# Altium PCB EMI-11-AF-5_IdtMcuV1_1.PcbDoc (part 2 of 2)
Units mm, origin at the board's own origin, x right, y up, seen from the top; angles counter-clockwise.
Board outline 22 x 20.01 mm, 4 copper layers (Top, Signal 1, Signal 2, Bottom), stack 1.02 mm thick; 58 components, 42 nets, 172 pads, 100 vias.
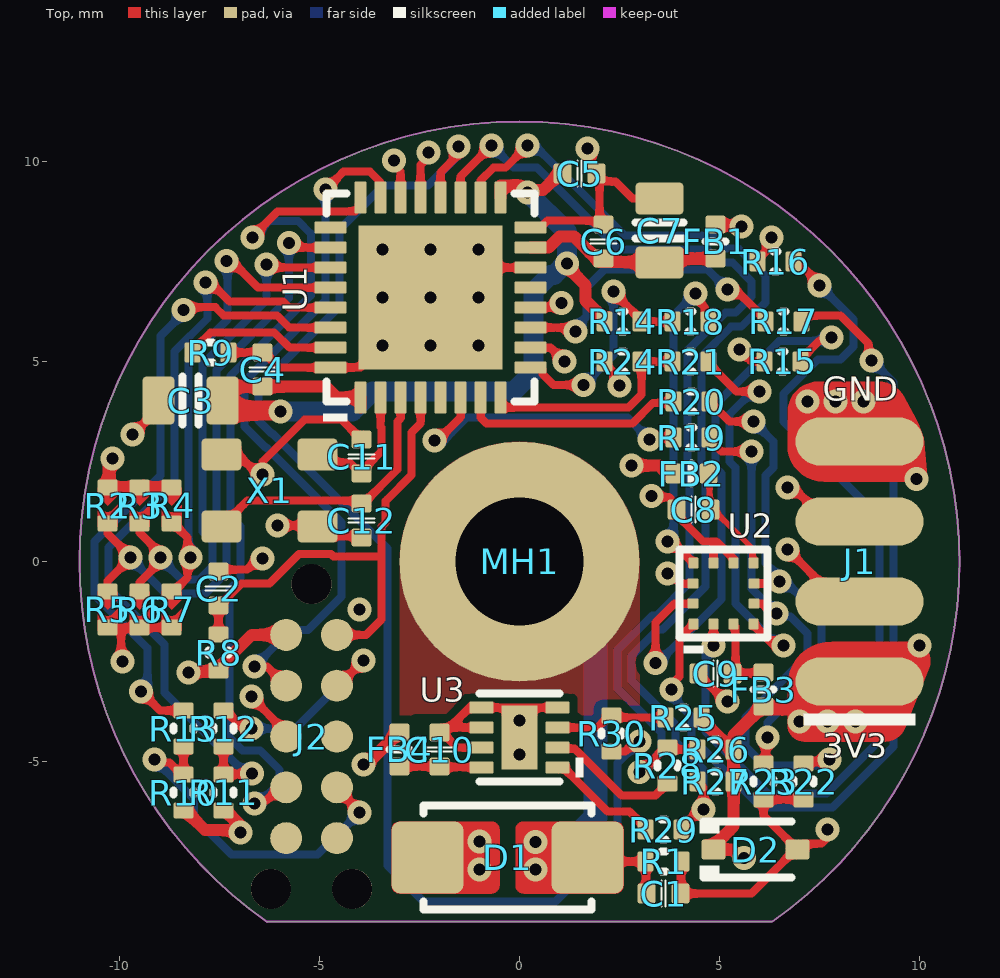
[diagram p0: Top view]

## Via types
v1: diameter 0.6, hole 0.3, Top to Bottom, tented both sides, 89 vias
v2: diameter 0.7, hole 0.3, Top to Bottom, tented bottom, 9 vias
v3: diameter 0.7, hole 0.3, Top to Bottom, tented both sides, 2 vias

## Nets (pads, with @x,y where several pads share a name; then routed paths per layer and width w, separated by ;. In a path a pad name is that pad's centre, name@x,y a point inside that pad or via, vN(x,y) a via of type N, cw(c..) or ccw(c..) an arc to the next point about the centre after c; other vN are vias at no path point) (continued)
3V3: (continued)
  Top w0.5: C3.1 -7.425,3.919 -7.275,3.769 -5.994,3.769 v1(-5.975,3.75)
  Signal 2 w0.3: v1(2.8,2.4) 2.869,2.331 3.719,2.331 5.6,0.45 5.6,-2.45 6.525,-3.375 7.402,-3.375 7.643,-3.616 7.643,-3.943 v1(7.7,-4)
  Bottom w0.5: v1(-5.975,3.75) -4.181,3.75 -3.681,4.25 -0.15,4.25 0.35,4.75 0.35,6.751 0.76,7.161 0.859,7.161 1.154,7.455 v1(1.181,7.455) 1.181,8.244 v1(0.2,9.225)
  other v1: -6.975,-6.775 8.4,-4 10,-2.1 -10.175,2.575
ACC_INT1: R19.2 U1.6 | length 7.8
  Top w0.2: v1(-2.125,3.025) -2.05,3.025 -1.475,3.6 U1.6 ; v1(3.251,3.05) 3.3,3.1 R19.2
  Bottom w0.2: v1(-2.125,3.025) -1.9,3.025 -1.325,3.6 2.7,3.6 v1(3.251,3.05)
ACC_INT2: R20.2 U1.7 | length 5.6
  Top w0.2: U1.7 -0.975,3.6 -0.825,3.45 2.823,3.45 3.34,3.968 3.85,3.968 R20.2
ACC_nCS: R14.2 R18.2 U1.9 | length 6
  Top w0.2: U1.9 0.525,4.85 0.575,4.8 0.575,4.689 0.85,4.414 v1(1.6,4.414) ; v1(2.35,6.75) 2.35,6.725 3.025,6.05 R14.2 R18.2
  Bottom w0.2: v1(1.6,4.414) 2.35,5.164 v1(2.35,6.75)
ACC_TRIG: R21.2 R24.1 U1.8 | length 5.5
  Top w0.2: U1.8 -0.475,3.85 2.728,3.85 3.05,4.172 3.05,4.975 R24.1 R21.2
CAN.RX: J1.3 U1.21 | length 21.3
  Top w0.2: U1.21 -2.475,9.917 -2.275,10.117 v1(-2.275,10.225) ; v1(6.7,1.846) 6.846,1.846 7.692,1 J1.3
  Signal 2 w0.2: v1(-2.275,10.225) -2.275,10.103 -4.025,8.353 -4.025,5.151 -2.799,3.925 -1.752,3.925 -1.677,3.85 2.728,3.85 2.828,3.95 3.623,3.95 5.728,1.846 v1(6.7,1.846)
CAN.TX: J1.2 U1.22 | length 22.6
  Top w0.2: v1(-3.136,10.025) -3.136,9.917 -2.975,9.756 U1.22 ; v1(6.7,0.3) J1.2@8,-1 ; J1.2@7.55,-0.55 J1.2@8,-1 ; J1.2 J1.2@8,-1
  Signal 2 w0.2: v1@-3.161,10 -4.375,8.786 -4.375,5.003 -2.947,3.575 -1.897,3.575 -1.822,3.5 2.873,3.5 2.973,3.6 3.478,3.6 6.7,0.379 v1(6.7,0.3)
DBG_UART.RX: R13.2 U1.30 | length 16
  Top w0.2: v1(-9.461,-3.25) -8.985,-3.725 R13.2 ; v1@-8.205,6.365 -8.198,6.359 -7.605,6.359 -7.396,6.15 -6.059,6.15 -5.759,5.85 U1.30
  Bottom w0.2: v1(-9.461,-3.25) -9.3,-3.089 -9.3,-2.168 -10.625,-0.842 -10.625,0.497 -8.975,2.147 -8.975,5.637 v1@-8.355,6.257
  other v1: -8.405,6.29
DBG_UART.TX: R11.2 R12.2 U1.29 | length 19.7
  Top w0.2: v1@-7.725,6.975 -7.251,6.5 -5.914,6.5 -5.764,6.35 U1.29 ; R12.2 R11.2 -7.388,-5.313 -6.698,-5.313 v1(-6.685,-5.3)
  Bottom w0.2: v1(-7.85,6.975) -7.805,6.929 -7.805,6.07 -8.625,5.25 -8.625,2.002 -10.275,0.352 -10.275,-0.674 -8.875,-2.075 -8.875,-3.273 -6.848,-5.3 v1(-6.685,-5.3) ; v1@-7.725,6.975 v1@-7.655,6.904
GND: C1.1 C2.2 C3.2 C4.2 C5.2 C6.2 C7.2 C8.2 C9.2 C10.2 C11.2 C12.2 D1.1 D2.2 J1.4 J2.3 R1.1 R5.2 R6.2 R7.2 R9.2 R22.2 R23.2 R24.2 U1.14 U1.16 U1.32 U1.33 U2.8 U2.9 U2.11 U3.4 U3.5 U3.6 U3.7 U3.9 X1.2 X1.4 | length 46.8
  Top w0.2: R5.2 -9.963,-1.65 ; v1(-9.925,-2.5) -9.963,-2.463 -9.963,-1.65 ; v1(-9.675,3.175) -9.025,3.825 C3.2 ; R7.2 R6.2 -9.963,-1.65 ; X1.4@-7.563,2.788 X1.4 -7.033,2.675 -6.534,2.175 v1(-6.425,2.175) -6.425,2.495 -5.37,3.55 -4.45,3.55 C11.2 ; C2.2 -7.477,-0.202 -6.811,-0.202 -6.534,0.075 v1(-6.425,0.075) ; R9.2 C4.2 ; v1@-6.733,-3.365 -5.835,-4.262 J2.3 ; C4.2@-6.425,5.275 -6,4.85 U1.32 -3.975,4.85 v2(-3.425,5.4) v2(-2.225,6.6) -1.475,7.35 U1.14 ; v1(-6.05,0.9) -5.075,0.9 X1.2 -4.813,0.638 -3.988,0.638 C12.2 ; C10.2@-2.1,-4.3 C10.2@-2,-4.2 ; U3.7 -1.55,-4.65 C10.2@-2,-4.2 ; U3.6 -1.75,-4.15 ; U1.16 0.525,8.35 0.699,8.524 C6.2@2.001,8.524 ; U3.4 0,-3.65 U3.5 -1.25,-3.65 -1.75,-4.15 ; v1(1.7,10.325) 1.7,10.217 1.8,10.118 1.8,9.825 C5.2 2,9.625 2,9.5 C6.2@2,8.525 ; C5.2@2.025,9.5 2.4,9.5 2.825,9.075 C7.2 ; C6.2 C6.2@2.001,8.524 ; R24.2@2.125,4.95 2.423,4.652 2.423,4.477 v1(2.5,4.4) ; v1(3.303,1.639) 3.332,1.609 3.739,1.609 3.925,1.424 C8.2 3.925,1.17 4.595,0.5 4.85,0.5 ; v1(3.7,-0.3) 3.7,-0.2 4.05,-0.55 U2.11 ; R1.1 4.038,-7.513 4.038,-8.287 C1.1 5.8,-8.3 D2.2@6.9,-7.2 ; C9.2 4.475,-2.825 5.15,-3.5 v1(5.2,-3.5) ; U2.9 4.85,0.5 ; U2.8 5.35,0.075 4.925,0.5 4.85,0.5 ; R23.2 6.1,-6.35 D2.2 7.1,-7.05 7.55,-7.05 7.7,-6.9 v1(7.7,-6.7) ; R23.2@6.15,-5.95 R22.2 ; C10.2@-2,-4.2 -1.95,-4.15 -1.75,-4.15
  other v1: -1,-7.7 -1,-7 -6.7,-3.375 -4,-1.2 9.926,2.069 7.2,4 7.9,4 8.6,4
  other v2: -2.225,5.4 -1.025,5.4 -3.425,6.6 -1.025,6.6 -3.425,7.8 -2.225,7.8 -1.025,7.8
  other v3: 0,-4.825 0,-3.975
I2C.SCL: R26.2 R28.2 U1.19 | length 25.9
  Top w0.2: U1.19 -1.475,9.625 v1(-0.7,10.4) ; v1(3,-5.267) 3.034,-5.267 3.65,-4.65 R28.2 3.75,-4.7 R26.2
  Bottom w0.2: v1(-0.7,10.4) -0.15,9.85 0.436,9.85 2.486,7.8 4.695,7.8 5.024,7.471 5.329,7.471 5.8,7 5.8,6.622 5.397,6.219 5.147,6.219 4.2,5.273 4.2,2.06 4.25,2.01 4.25,-0.528 3.431,-1.347 3.319,-1.347 2.45,-2.215 2.45,-3.172 3.55,-4.272 3.55,-4.728 3.011,-5.267 v1(3,-5.267)
I2C.SDA: R27.2 R29.2 U1.18 | length 26.6
  Top w0.2: U1.18 -0.975,9.525 -0.653,9.847 -0.353,9.847 v1(0.2,10.4) ; R29.2 4.05,-6.65 4.5,-6.2 v1(4.6,-6.2) 4.6,-5.65 R27.2
  Bottom w0.2: v1(0.2,10.4) 0.381,10.4 2.631,8.15 4.84,8.15 5.169,7.821 5.474,7.821 6.15,7.145 6.15,6.477 5.542,5.869 5.292,5.869 4.55,5.128 4.55,2.205 4.65,2.105 4.65,-0.623 3.573,-1.7 3.46,-1.7 2.8,-2.36 2.8,-2.978 3.9,-4.078 3.9,-4.495 4.6,-5.195 v1(4.6,-6.2)
MCU_HW_VER0: R2.2 R5.1 U1.26 | length 15.4
  Top w0.2: R5.1 -10.3,-0.49 -9.725,0.084 v1(-9.725,0.1) -9.725,0.129 -10.3,0.703 R2.2 ; v1(-5.769,7.969) -5.65,7.85 U1.26
  Bottom w0.2: v1(-9.725,0.1) -9.725,0.072 -8.853,-0.8 -7.853,-0.8 -7.325,-0.273 -7.325,0.675 -7.575,0.925 -7.575,4.787 -5.769,6.594 v1(-5.769,7.969)
MCU_HW_VER1: R3.2 R6.1 U1.27 | length 13.8
  Top w0.2: R6.1 -9.5,-0.524 -8.975,0.001 v1(-8.975,0.1) -8.975,0.199 -9.5,0.724 R3.2 ; v1(-6.325,7.425) -6.25,7.35 U1.27
  Bottom w0.2: v1(-8.975,0.1) -8.975,0.072 -8.453,-0.45 -7.998,-0.45 -7.675,-0.128 -7.675,0.5 -7.925,0.75 -7.925,4.932 -6.325,6.533 v1(-6.325,7.425)
MCU_HW_VER2: R4.2 R7.1 U1.28 | length 12.5
  Top w0.2: R7.1 -8.65,-0.75 -8.302,-0.402 -8.302,0.023 v1(-8.225,0.1) -8.302,0.177 -8.302,0.602 -8.65,0.95 R4.2 ; v1@-7.075,7.386 -6.539,6.85 U1.28
  Bottom w0.2: v1(-8.225,0.1) -8.275,0.15 -8.275,5.077 -7.3,6.052 v1@-7.3,7.486
  other v1: -7.325,7.511
NetC6_1: C6.1 C7.1 FB1.1 U1.15 | length 5.1
  Top w0.3: U1.15 0.727,7.85 0.975,8.098 1.002,8.124 1.361,8.124 2,7.485 3.49,7.485 C7.1 ; C7.1@3.488,7.413 3.65,7.575 FB1.1
NetC8_1: C8.1 FB2.1 U2.7 | length 2.7
  Top w0.15: FB2.1 4.75,2.175 4.75,1.399 5.824,0.325 5.824,-0.011 U2.7
NetC9_1: C9.1 FB3.1 U2.3 | length 2.1
  Top w0.2: C9.1 C9.1@5.338,-2.788 ; U2.3 5.35,-1.575 5.4,-1.625 5.4,-2.725 C9.1@5.338,-2.788 ; FB3.1 6.088,-2.788 C9.1@5.338,-2.788
NetC10_1: C10.1 FB4.1 U3.8 | length 2.1
  Top w0.2: FB4.1 C10.1 -1.988,-5.138 -0.963,-5.138 U3.8
NetJ2_7: J2.7 R10.2 R13.1 | length 9.3
  Top w0.2: v1(-9.125,-4.95) -9.048,-5.027 -8.749,-5.027 -8.45,-5.325 R10.2 R13.1 ; J2.7 -4.565,-5.678 -4,-6.243 v1(-4,-6.275)
  Bottom w0.2: v1(-9.125,-4.95) -8.137,-5.938 -8.137,-6.391 -7.203,-7.325 -5.05,-7.325 v1(-4,-6.275)
NetJ2_9: J2.9 R12.1 | length 5.3
  Top w0.2: R12.1 -7.35,-3.725 -6.976,-4.099 -6.777,-4.099 v1(-6.7,-4.175) ; J2.9 -4.548,-3.123 v1(-3.9,-2.475)
  Bottom w0.2: v1(-6.7,-4.175) -5.6,-4.175 v1(-3.9,-2.475)
NetR9_1: R9.1 U1.31 | length 3.8
  Top w0.2: R9.1 -8.175,5.275 -7.721,5.729 -6.133,5.729 -5.754,5.35 U1.31
NetR15_1: R15.1 U2.12 | length 14
  Top w0.2: v1(3.404,-2.534) 3.4,-2.531 3.4,-1.522 3.872,-1.05 U2.12 ; R15.1 7.025,5.05 7.499,5.523 7.723,5.523 v1(7.8,5.6)
  Bottom w0.2: v1(3.404,-2.534) 3.457,-2.534 5.05,-0.942 5.05,0.218 5.05,2.2 4.9,2.35 4.9,3.922 5.728,4.75 6.493,5.515 v1@7.8,5.515
NetR16_1: R16.1 U2.2 | length 22.9
  Top w0.2: v1(4.85,-2.1) U2.2 ; R16.1@6.925,7.5 6.95,7.5 7.5,6.95 v1(7.5,6.9)
  Bottom w0.2: v1(4.85,-2.1) 4.65,-2.3 4.65,-4.25 6.2,-5.8 7.678,-5.8 9,-4.478 9,1.1 6.6,3.5 6.6,4.192 7.458,5.05 8.028,5.05 8.35,5.372 8.35,6.05 v1(7.5,6.9)
NetR17_1: R17.1 U2.1 | length 22.1
  Top w0.2: v1(3.8,-3.2) 3.8,-3.078 4,-2.878 4,-1.912 U2.1 ; R17.1 7.05,6.05 7.15,6.15 8.028,6.15 8.724,5.454 8.724,5.102 v1(8.8,5.025)
  Bottom w0.2: v1(3.8,-3.2) 3.8,-3.373 4.3,-3.873 4.3,-4.4 6.05,-6.15 7.823,-6.15 9.35,-4.623 9.35,4.476 v1(8.8,5.025)
NetR18_1: R18.1 U2.10 | length 8.2
  Top w0.2: v1(3.7,0.5) 3.813,0.5 U2.10 ; v1(4.4,6.7) 4.4,6.592 4.625,6.367 4.625,6.1 R18.1
  Bottom w0.2: v1(3.7,0.5) 3.7,0.608 3.85,0.758 3.85,1.408 3.853,1.411 3.853,1.912 3.85,1.915 3.85,6.15 v1(4.4,6.7)
NetR19_1: R19.1 R22.1 U2.5 | length 13.7
  Top w0.2: R19.1 4.75,3.05 5.05,2.75 v1(5.8,2.75) ; U2.5 6.067,-1.05 6.317,-1.3 v1(6.425,-1.3) ; R22.1 7.15,-5 7.7,-5 v1(7.75,-4.95)
  Bottom w0.2: v1(5.8,2.75) 5.8,-0.675 v1(6.425,-1.3) 6.497,-1.372 6.772,-1.372 7.2,-1.8 7.2,-2.35 5.65,-3.9 5.65,-4.628 6.122,-5.1 7.6,-5.1 v1(7.75,-4.95)
NetR20_1: R20.1 R23.1 U2.6 | length 12
  Top w0.2: R20.1 5.25,3.5 v1(5.845,3.5) ; U2.6 v1@6.45,-0.55 ; R23.1 6.15,-5 6.15,-4.45 v1(6.2,-4.4)
  Bottom w0.2: v1(5.845,3.5) 6.35,2.995 6.35,2.35 6.15,2.15 6.15,-0.042 6.5,-0.392 v1(6.5,-0.5) 6.648,-0.5 7.55,-1.402 7.55,-2.672 6.2,-4.022 v1(6.2,-4.4)
NetR21_1: R21.1 U2.4 | length 10
  Top w0.2: R21.1 4.725,4.95 5.425,4.25 v1(6.006,4.25) ; U2.4 5.85,-1.575 6.375,-2.1 v1(6.6,-2.1)
  Bottom w0.2: v1(6.006,4.25) 5.817,4.25 5.25,3.683 5.25,2.495 5.4,2.345 5.4,-1.053 6.447,-2.1 v1(6.6,-2.1)
NetR25_2: R25.2 R30.1 U3.3 | length 2.8
  Top w0.2: U3.3 1.95,-4.15 2.25,-3.85 R30.1 2.35,-3.9 R25.2
NetR28_1: R28.1 U3.2 | length 3.4
  Top w0.2: U3.2 0.975,-4.675 1.375,-4.675 2.55,-5.85 3.4,-5.85 R28.1
NetR29_1: R29.1 U3.1 | length 2.9
  Top w0.2: U3.1 1.1,-5.15 2.2,-6.25 2.75,-6.25 3.15,-6.65 R29.1
nRST: C2.1 J2.10 R8.2 U1.4 | length 12.6
  Top w0.2: R8.2 C2.1 -7.5,-1.1 -6.952,-0.552 -6.248,-0.552 -5.511,0.185 -4.71,0.185 -4.65,0.125 -3.465,0.125 -3.45,0.11 ; J2.10 -3.835,-1.835 -3.45,-1.45 -3.45,0.11 ; U1.4 -2.475,3.453 -2.7,3.228 -2.7,2.159 -3.307,1.552 -3.307,1.551 -3.346,1.512 -3.346,1.501 -3.35,1.497 -3.35,0.971 -3.45,0.871 -3.45,0.11
SHIELD: C1.2 D1.2 MH1.1 R1.2 | length 11.9
  Top w0.2: D1.2 1.8,-7.5 R1.2 3.163,-7.512 3.163,-8.287 C1.2
  Bottom w0.6: MH1.1 1.9,-1.9 1.9,-6.4 1.29,-7.01 v1(0.4,-7.01) v1(0.4,-7.7)
SPI.MISO: R17.2 U1.11 | length 7.6
  Top w0.2: U1.11 1.3,5.85 v1(1.4,5.75) ; v1(5.2,6.8) 5.4,6.8 6.15,6.05 R17.2
  Bottom w0.2: v1(1.4,5.75) 1.4,5.85 1.674,6.125 1.674,6.852 2.122,7.3 4.7,7.3 v1(5.2,6.8)
SPI.MOSI: R16.2 U1.12 | length 7.8
  Top w0.2: U1.12 0.939,6.35 v1(1.05,6.461) ; v1@0.915,6.35 v1@0.927,6.338 ; R16.2@5.9,7.5 6.227,7.827 6.227,8.02 v1(6.304,8.096)
  Signal 2 w0.2: v1@1.111,6.4 v1(1.05,6.461) 1.862,6.461 2.122,6.2 2.867,6.2 4.017,7.35 5.55,7.35 6.296,8.096 v1(6.304,8.096)
SPI.SCK: R15.2 U1.10 | length 6.2
  Top w0.2: U1.10 0.775,5.35 v1(1.125,5) ; v1(5.5,5.3) 5.8,5 R15.2
  Signal 2 w0.2: v1(1.125,5) 5.092,5 5.392,5.3 v1(5.5,5.3)
SWD.SWCLK: J2.4 U1.24 | length 22.4
  Top w0.2: v1@-6.7,8.1 -6.05,8.75 -4.525,8.75 -4.113,8.75 -3.975,8.888 U1.24 ; v1(-6.625,-6.05) -6.549,-5.974 -6.326,-5.974 -5.997,-5.645 J2.4
  Bottom w0.2: v1(-6.675,8.1) -6.664,8.1 -6.245,8.519 -5.541,8.519 -5.219,8.196 -5.219,6.649 -7.225,4.642 -7.225,1.125 -6.975,0.875 -6.975,-0.418 -7.25,-0.692 -7.25,-4.403 -6.928,-4.725 -6.483,-4.725 -6,-5.208 -6,-5.533 -6.517,-6.05 v1(-6.625,-6.05)
SWD.SWDIO: J2.2 U1.23 | length 18.4
  Top w0.2: v1(-6.631,-2.625) -6.315,-2.625 J2.2 ; -4.537,9.594 -4.832,9.3 v1(-4.85,9.3) -4.546,9.604 -4.4,9.75 -3.744,9.75 -3.475,9.481 U1.23
  Bottom w0.2: v1(-6.631,-2.625) -5.719,-1.712 -5.286,-1.712 -4.45,-0.876 -4.45,0.978 -6.323,2.85 -6.348,2.85 -6.875,3.377 -6.875,4.497 -4.85,6.523 v1(-4.85,9.3)
TS_ALERT: R30.2 U1.20 | length 33.8
  Top w0.2: U1.20 -1.975,9.725 -1.525,10.175 v1(-1.525,10.375) v1@-1.525,10.4 ; R30.2 2.642,-4.75 2.892,-4.5 v1(3,-4.5)
  Bottom w0.2: v1@-1.525,10.4 -1.602,10.323 -1.602,10.089 -2.288,9.403 -3.397,9.403 -4.5,8.3 -4.5,6.378 -6.525,4.353 -6.525,3.522 -6.203,3.2 -6.178,3.2 -3.3,0.323 -3.3,-7.6 -2.4,-8.5 0.9,-8.5 2.45,-6.95 2.45,-5.039 2.989,-4.5 v1(3,-4.5)
XTAL_1: C11.1 U1.2 X1.3 | length 3.5
  Top w0.2: X1.3 -4.85,2.475 -4.25,2.475 -3.975,2.2 C11.1 -3.875,2.2 -3.875,2.329 -3.45,2.754 -3.45,3.346 -3.473,3.368 -3.473,4.097 U1.2
XTAL_2: C12.1 U1.3 X1.1 | length 6.9
  Top w0.2: X1.1 -6.8,1.525 -4.025,1.525 C12.1 -3.904,1.45 -3.05,2.304 -3.05,3.5 -2.975,3.575 U1.3
pads on no net: J2.0 J2.5 J2.6 J2.8 U1.5 U1.13 U1.25

## Polygon pours and split planes (outlines as drawn)
3V3 on Signal 2 "Signal 2-GND" (solid, remove dead copper, pour order 26): -6.308,-9 6.324,-9 ccw(c-0.056,0.029) 11,0 ccw(c0.029,0.029) 0,11 ccw(c-0.103,0.103) -11,0 ccw(c-0.413,-0.204)
GND on Signal 2 "Signal 2-GND 1" (solid, remove dead copper, pour order 24): 3.2,-4.2 3.2,0 ccw(c0,0) -3.2,0 -3.2,-4.2 ccw(c-1.899,-4.2) -1.898,-5.501 1.898,-5.501 ccw(c1.898,-4.2)
GND on Signal 1 "Signal 1-GND" (solid, remove dead copper, pour order 22): -6.308,-9 6.324,-9 ccw(c-0.056,0.029) 11,0 ccw(c0.029,0.029) 0,11 ccw(c-0.103,0.103) -11,0 ccw(c-0.413,-0.204)
SHIELD on Top "Top-SHIELD" (solid, pour order 18): -3,0 cw(c0,0) 3,0 3,-4.3 -3,-4.3
GND on Bottom "Bottom-GND" (solid, remove dead copper, pour order 28): -6.308,-9 6.324,-9 ccw(c-0.056,0.029) 11,0 ccw(c0.029,0.029) 0,11 ccw(c-0.103,0.103) -11,0 ccw(c-0.413,-0.204)

## Keep-outs
Keep-Out Layer:
  lines w0.05: -6.308,-9.012 cw(c0,0) -11,0 cw(c0,0) 11,0 cw(c0,0) 6.324,-9 -6.308,-9

## Other copper
Top:
  region net 3V3: 7.1,-4.5 9.152,-4.5 ccw(c9.152,-3.984) 9.632,-4.175 10.239,-2.653 ccw(c9.797,-2.477) 9.797,-2 7.8,-2 ccw(c7.8,-3.1) 6.7,-3.1 6.7,-4.1 ccw(c7.1,-4.1)
  region net GND: 10.2,2 7.6,2 cw(c7.6,2.9) 6.7,2.9 6.7,3.722 cw(c7.478,3.722) 7.478,4.5 8.958,4.5 cw(c8.958,3.728) 9.684,3.99 9.93,3.531 cw(c8.399,2.71) 10.047,3.259 10.1,3.1
  region net SHIELD: 2.6,-6.7 2.6,-8.1 cw(c2.4,-8.1) 2.4,-8.3 0.1,-8.3 cw(c0.1,-8.1) -0.1,-8.1 -0.1,-6.7 cw(c0.1,-6.7) 0.1,-6.5 2.4,-6.5 cw(c2.4,-6.7)
  region net GND: -3.2,-8.1 -3.2,-6.7 cw(c-3,-6.7) -3,-6.5 -0.7,-6.5 cw(c-0.7,-6.7) -0.5,-6.7 -0.5,-8.1 cw(c-0.7,-8.1) -0.7,-8.3 -3,-8.3 cw(c-3,-8.1)
  pour cut-out: -0.001,3.399 ccw(c-0.002,0.001) -3.4,0 -3.47,-5.909 -3,-5.909 -3,0 cw(c-0.004,0.004) 0,3 cw(c-0.004,-0.004) 3,0 3,-5.2 -2.9,-5.2 -2.9,-5.909 3,-5.909 3.4,-5.909 3.4,0 ccw(c0.001,0)
  pour cut-out: -2.6,-3.8 -1.4,-3.8 -1.25,-3.65 -0.5,-3.65 -0.5,-4.9 -2.6,-4.9
  pour cut-out: -10.35,-1.2 -10.4,-1.25 -10.4,-2.7 -8.8,-2.7 -8.8,-2.3 -6.4,-2.3 -6.4,-0.4 -7.5,-0.4 -7.5,-1.2
Signal 1:
  pour cut-out: -0.001,3.399 ccw(c-0.002,0.001) -3.4,0 -3.4,-4.2 ccw(c-1.903,-4.2) -1.908,-5.697 -0.1,-5.704 -0.1,-5.3 -1.896,-5.3 cw(c-1.896,-4.211) -2.985,-4.215 -3,0 cw(c-0.011,0.011) 0,3 cw(c-0.004,-0.004) 3,0 3,-4.2 cw(c1.9,-4.2) 1.9,-5.3 0.1,-5.3 0.1,-5.703 1.897,-5.703 ccw(c1.897,-4.2) 3.4,-4.2 3.4,0 ccw(c0.001,0)
Signal 2:
  pour cut-out: -0.001,3.399 ccw(c-0.002,0.001) -3.4,0 -3.4,-4.2 ccw(c-1.903,-4.2) -1.908,-5.697 0,-5.704 0,-5.3 -1.896,-5.3 cw(c-1.896,-4.211) -2.985,-4.215 -3,0 cw(c-0.011,0.011) 0,3 cw(c-0.004,-0.004) 3,0 3,-4.2 cw(c1.9,-4.2) 1.9,-5.3 0.1,-5.3 0.1,-5.703 1.897,-5.703 ccw(c1.897,-4.2) 3.4,-4.2 3.4,0 ccw(c0.001,0)
Bottom:
  pour cut-out: -0.001,3.399 ccw(c-0.002,0.001) -3.4,0 -3.4,-8.088 0,-8.1 0,-7.6 -2.972,-7.6 -3,0 cw(c-0.011,0.011) 0,3 cw(c-0.004,-0.004) 3,0 3,-7.6 0.1,-7.6 0.1,-8.1 3.4,-8.1 3.4,0 ccw(c0.001,0)
  pour cut-out: -9.826,3.931 -9.826,3.031 -9.126,3.031 -9.126,3.931
  pour cut-out: -10.251,-2.069 -10.251,-2.969 -9.551,-2.969 -9.551,-2.069
  pour cut-out: -7.026,-1.769 -7.026,-2.669 -6.326,-2.669 -6.326,-1.769
  pour cut-out: 7.374,-6.269 7.374,-7.169 8.074,-7.169 8.074,-6.269
  pour cut-out: 4.874,-3.069 4.874,-3.969 5.574,-3.969 5.574,-3.069
  pour cut-out: 1.474,10.556 1.474,9.656 2.174,9.656 2.174,10.556
  pour cut-out: 2.174,4.831 2.174,3.931 2.874,3.931 2.874,4.831
  pour cut-out: -4.226,-2.169 -4.226,-3.069 -3.526,-3.069 -3.526,-2.169
  pour cut-out: 7.574,4.431 7.574,3.531 8.274,3.531 8.274,4.431
  pour cut-out: 6.874,4.431 6.874,3.531 7.574,3.531 7.574,4.431
  pour cut-out: 8.274,4.431 8.274,3.531 8.974,3.531 8.974,4.431
  pour cut-out: 9.6,2.5 9.6,1.6 10.3,1.6 10.3,2.5

## Silkscreen, mask and mechanical layers (free items; w line width, h text height)
Top Overlay:
  text "GND" at 7.575,4.025 h0.6
  text "3V3" at 7.575,-4.911 h0.6
Bottom Overlay:
  text "GND" at 10.1,2.53 h0.6
  text "CAN_RX" at 10.525,0.43 h0.6
  text "CAN_TX" at 10.5,-1.57 h0.6
  text "3V3" at 9.9,-3.47 h0.6
Info:
  circle w0.1: c0,0 r1.6
  circle w0.1: c0,0 r2.75

## Dimensions
11.504,0 to 7.2,-9 on Dim
11,0 to 3,11 on Dim
11,0 to -11,0 on Dim
-3,11 to -7.1,-9 on Dim